# Altium PCB 控制板.PcbDoc
Units mil, origin at the board's own origin, x right, y up, seen from the top; angles counter-clockwise.
Board outline 6220.47 x 2125.98 mil, 2 copper layers (Top Layer, Bottom Layer); 65 components, 149 nets, 530 pads, 107 vias.
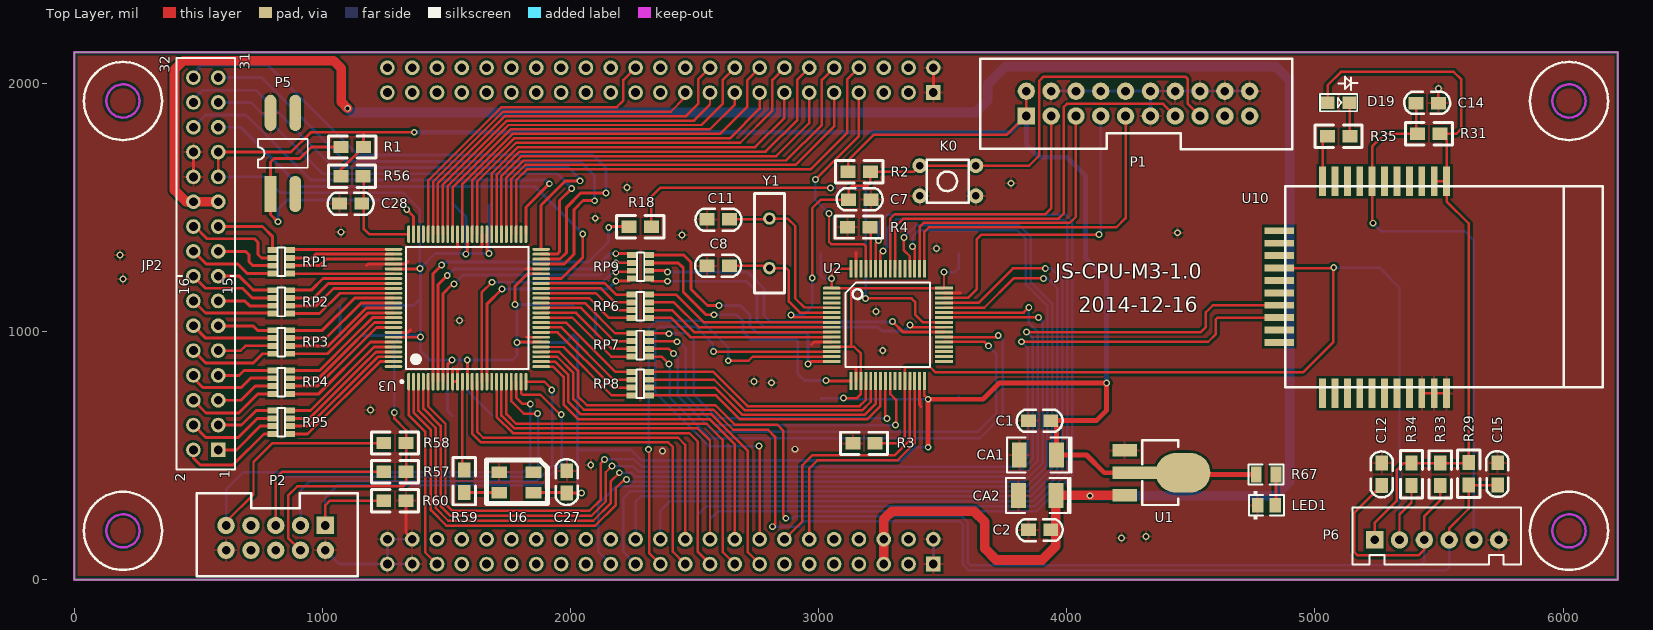
[diagram p0: Top Layer view]
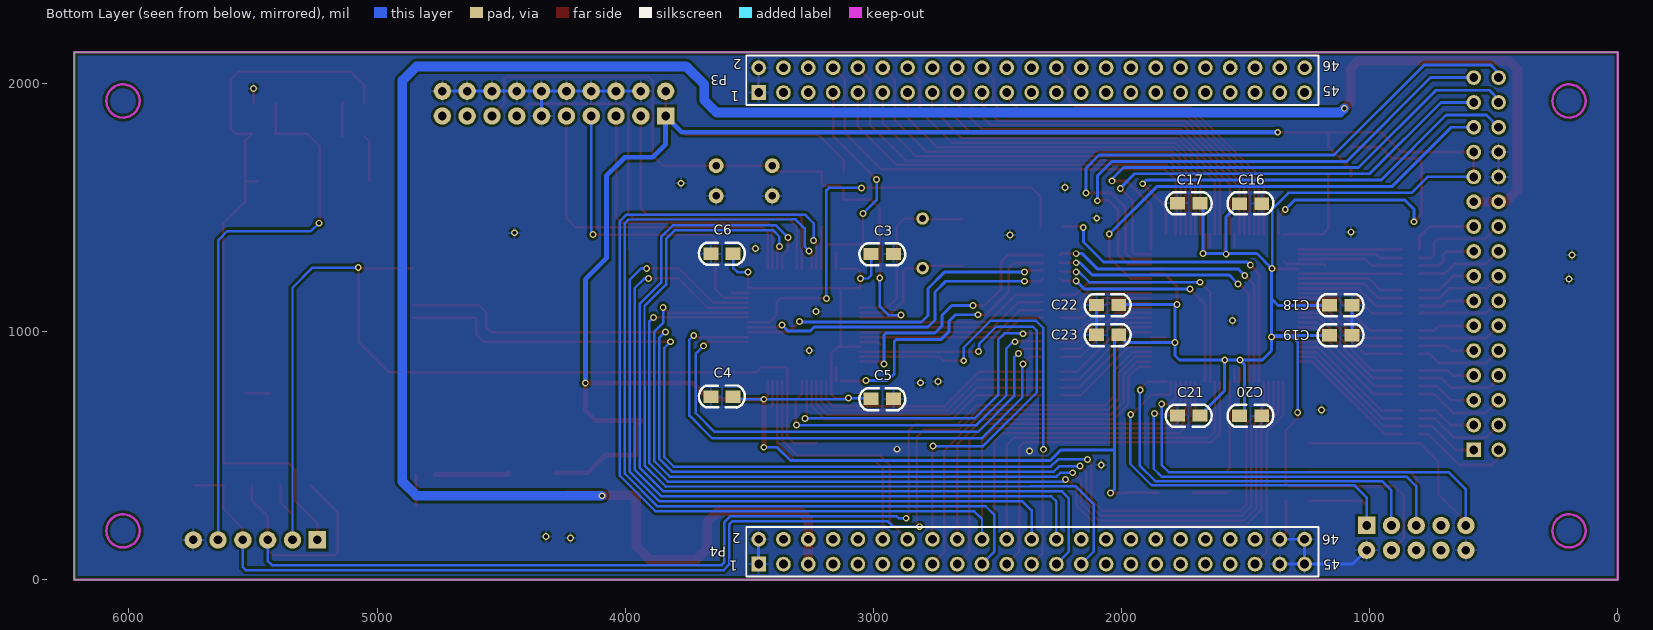
[diagram p1: Bottom Layer view, seen from below]

## Layer stack, top to bottom
Top Solder: solder mask 0.4, Solder Resist, Dk 3.5
Top Layer: signal copper 1.4
Dielectric1: dielectric 12.6, FR-4, Dk 4.8
Bottom Layer: signal copper 1.4
Bottom Solder: solder mask 0.4, Solder Resist, Dk 3.5

## Board outline
0,0 0,2125.98 6220.47,2125.98 6220.47,0

## Design rules (kind name [scope] priority, off if disabled: settings)
Clearance Clearance_1 [InPolygon] p1: gap=10
Clearance [All] p2: gap=7.87
FabricationTestPointUsage TestPointUsage [All] p1: valid=0 allowmultiple=FALSE
FabricationTestpoint Testpoint [(IsPad And (OnTopLayer Or OnBottomLayer))] p1: side=3 testpointundercomponent=TRUE minsize=40 maxsize=100 preferedsize=60 minholesize=0 maxholesize=40 preferedholesize=32 testpointgrid=1 allowsidetop=TRUE allowsidebottom=TRUE usegrid=TRUE gridtolerance=0.01
Height [All] p1: minheight=0 maxheight=3937.01 prefheight=0
HoleSize [All] p1: absolutevalues=TRUE maxlimit=137.8 minlimit=1 maxpercent=80.000 minpercent=20.000
PolygonConnect [All] p1: connectstyle=Relief reliefconductorwidth=10 reliefentries=4 polygonreliefangle="90 Angle" airgapwidth=10
RoutingVias [All] p1: holewidth=13.78 width=25.59 viastyle="Through Hole" minholewidth=13.78 minwidth=25.59 maxholewidth=28 maxwidth=50
SolderMaskExpansion [All] p1: expansion=4
Width [All] p1: maxlimit=78.74 minlimit=10 preferedwidth=11.81 minimp=50.000000 maximp=50.000000 favimp=50.000000
25 further rules are at their usual default settings.

## Components (designator, comment, footprint, x,y, rotation, side; value= is the part's Value field where it differs from the comment)
C1 "0.1uF" C0805 3857.48,645.28 r0 top
C2 "0.1uF" C0805 3857.48,205.51 r0 top
C3 "0.1uF" C0805 2996.85,1316.93 r180 bottom
C4 "0.1uF" C0805 3577.17,733.07 r0 bottom
C5 "0.1uF" C0805 2996.85,733.07 r180 bottom
C6 "0.1uF" C0805 3577.17,1309.06 r0 bottom
C7 "0.1uF" C0805 3198.43,1527.56 r180 top
C8 "22pF" C0805 2627.95,1260.24 r180 top
C11 "22pF" C0805 2562.99,1456.3 r0 top
C12 "101" C0805 5273.62,457.48 r270 top
C14 "0.1uF" C0805 5485.04,1916.14 r180 top
C15 "101" C0805 5740.55,459.06 r270 top
C16 "0.1uF" C0805 1447.24,1511.19 r0 bottom
C17 "0.1uF" C0805 1762.2,1521.65 r180 bottom
C18 "0.1uF" C0805 1084.27,1100.95 r0 bottom
C19 "0.1uF" C0805 1084.27,980.26 r0 bottom
C20 "0.1uF" C0805 1447.24,655.68 r0 bottom
C21 "0.1uF" C0805 1762.2,666.14 r180 bottom
C22 "0.1uF" C0805 2088.96,1111.42 r180 bottom
C23 "0.1uF" C0805 2088.96,990.72 r180 bottom
C27 "0.1uF" C0805 1990.16,426.77 r270 top
C28 "0.1uF" C0805 1081.1,1520.47 r0 top
CA1 "4.7UF/16V" 3528cap 3957.48,503.54 r180 top
CA2 "10UF/16V" 3528cap 3954.72,340.16 r180 top
D19 "VDD33" 0805LED 5096.46,1922.05 r0 top
JP2 "Header2*16" PIN-S-2.54-2*16 579.53,523.23 r90 top
K0 "KEY" KEY-DIP 3518.5,1605.91 r180 top
LED1 "0805/Green" LED-0805 4863.78,335.04 r180 top
P1 "Header 10X2" IDC-20 3835.83,1868.5 r0 top
P2 "Header 5X2" IDC-10 1013.39,218.9 r180 top
P3 "Header 23X2" HDR2X23 3462.2,1962.99 r180 bottom locked
P4 "Header 23X2" HDR2X23 3462.2,63.15 r180 bottom locked
P5 "Header 2X2" SOP4 791.34,1554.33 r90 top
P6 "ISP" SIP-6B 5240.55,160.63 r0 top
R1 "10K" R0805 1129.53,1737.8 r0 top
R2 "10k" R0805 3172.44,1637.8 r0 top
R3 "10K" R0805 3191.73,543.31 r0 top
R4 "10K" R0805 3170.47,1414.96 r0 top
R18 "22Ω" R0805 2290.16,1416.93 r0 top
R29 "3.3k" R0805 5613.39,418.11 r270 top
R31 "Res2" 0805 5413.78,1797.24 r0 top
R33 "3.3k" R0805 5499.21,415.75 r270 top
R34 "10K" R0805 5394.88,433.86 r90 top
R35 "620Ω" R0805 5104.33,1780.71 r0 top
R56 "10K" R0805 1110.63,1632.28 r180 top
R57 "10K" R0805 1301.57,428.84 r0 top
R58 "10K" R0805 1301.57,544.88 r0 top
R59 "33Ω" R0805 1566.54,388.1 r270 top
R60 "10K" R0805 1283.57,324.8 r180 top
R67 "1K/1%/0805/1/8W" R-0805 4862.2,459.45 r180 top
RP1 "RESPACK4" 8P4R_0603 800.08,1328.35 r0 top
RP2 "RESPACK4" 8P4R_0603 800.08,1166.73 r0 top
RP3 "RESPACK4" 8P4R_0603 800.08,1005.12 r0 top
RP4 "RESPACK4" 8P4R_0603 800.08,843.5 r0 top
RP5 "RESPACK4" 8P4R_0603 800.08,681.89 r0 top
RP6 "RESPACK4" 8P4R_0603 2246.46,1149.21 r0 top
RP7 "RESPACK4" 8P4R_0603 2246.46,993.31 r0 top
RP8 "RESPACK4" 8P4R_0603 2246.46,837.4 r0 top
RP9 "RESPACK4" 8P4R_0603 2247.24,1308.27 r0 top
U1 "AS1117-3.3V" SOT-223 4467.32,431.1 r270 top
U2 "STM32" LQFP64 3052.36,1174.8 r0 top locked
U3 "EPM240T100C5N" TQFP100_N 1584.25,1095.28 r90 top locked
U6 "oscillator" JZ-5032 1781.89,392.13 r180 top
U10 "STM32W108-3" STM32W108-3 4880.32,775.98 r0 top
Y1 "8MHZ" XTAL 2801.57,1255.51 r90 top

## Footprints (in the part's own frame and the unit in brackets; to place one, negate y for a bottom-side part, rotate by r counter-clockwise, add the part's x,y. Pads: shape width x height; smd on the part's side, far side on the other; paste and mask are expansions set on the pad)
8P4R_0603 [mm]
  rect 1.016x0.6 smd: 1(0,0) 2(1.778,0) 3(0,-0.8) 4(1.778,-0.8) 5(0,-1.6) 6(1.778,-1.6) 7(0,-2.4) 8(1.778,-2.4)
  silkscreen extent 0.51,-2.67 1.27,0.25
0805 [mil]
  rect 60x50 smd: 1(0,0) 2(90,0)
  silkscreen extent -50,-45 140,45
0805LED [mm]
  rect 1.4x1.27 smd: 1(-1.143,0.013) 2(1.067,0.013)
  silkscreen extent -1.94,-0.88 1.88,2.67
3528cap [mil]
  rect 60x100 smd: 1(-1,1) 2(149,1)
  silkscreen extent -61,-69 199,71
C0805 [mm]
  rect 1.524x1.27 smd: 1(-0.31,-0.11) 2(1.976,-0.11)
  silkscreen extent -1.51,-1.26 3.19,0.99
HDR2X23 [mm] "Connector; Header; 23x2 Position"
  rect 1.5x1.5 hole 0.9: 1(0,0)
  round 1.5 hole 0.9: 2(0,2.54) 3(2.54,0) 4(2.54,2.54) 5(5.08,0) 6(5.08,2.54) 7(7.62,0) 8(7.62,2.54) 9(10.16,0) 10(10.16,2.54) 11(12.7,0) 12(12.7,2.54) 13(15.24,0) 14(15.24,2.54) 15(17.78,0) 16(17.78,2.54) 17(20.32,0) 18(20.32,2.54) 19(22.86,0) 20(22.86,2.54) 21(25.4,0) 22(25.4,2.54) 23(27.94,0) 24(27.94,2.54) 25(30.48,0) 26(30.48,2.54) 27(33.02,0) 28(33.02,2.54) 29(35.56,0) 30(35.56,2.54) 31(38.1,0) 32(38.1,2.54) 33(40.64,0) 34(40.64,2.54) 35(43.18,0) 36(43.18,2.54) 37(45.72,0) 38(45.72,2.54) 39(48.26,0) 40(48.26,2.54) 41(50.8,0) 42(50.8,2.54) 43(53.34,0) 44(53.34,2.54) 45(55.88,0) 46(55.88,2.54)
  silkscreen extent -1.27,-1.27 57.28,3.81
IDC-10 [mil]
  rect 70x70 hole 35: 1(1,0)
  round 70 hole 35: 2(1,100) 3(101,0) 4(101,100) 5(201,0) 6(201,100) 7(301,0) 8(301,100) 9(401,0) 10(401,100)
  silkscreen extent -130,-130 520,205
IDC-20 [mil]
  rect 70x70 hole 35: 1(1,0)
  round 70 hole 35: 2(1,100) 3(101,0) 4(101,100) 5(201,0) 6(201,100) 7(301,0) 8(301,100) 9(401,0) 10(401,100) 11(501,0) 12(501,100) 13(601,0) 14(601,100) 15(701,0) 16(701,100) 17(801,0) 18(801,100) 19(901,0) 20(901,100)
  silkscreen extent -185,-133 1073,231
JZ-5032 [mm]
  rect 1.6x1.2 smd: 1(-1.75,-1.05) 2(1.75,-1.05) 3(1.75,1.05) 4(-1.75,1.05)
  silkscreen extent -3.18,-2.29 3.05,2.16
KEY-DIP [mil]
  round 60 hole 30: 1(-115,59.45) 2(-115,-62.6) 3(111,-62.6) 4(111,59.45)
  silkscreen extent -87,-86 83,87
LED-0805 [mm]
  rect 1.2x1.5 smd: 1(0.6,0.9) 2(2.4,0.9)
  silkscreen extent -0.3,-0.55 3.3,2.35
LQFP64 [mm]
  oval 1.8x0.3 smd: 1(0,0)
  rect 1.8x0.3 smd: 2(0,-0.5) 3(0,-1) 4(0,-1.5) 5(0,-2) 6(0,-2.5) 7(0,-3) 8(0,-3.5) 9(0,-4) 10(0,-4.5) 11(0,-5) 12(0,-5.5) 13(0,-6) 14(0,-6.5) 15(0,-7) 16(0,-7.5) 33(11.5,-7.5) 34(11.5,-7) 35(11.5,-6.5) 36(11.5,-6) 37(11.5,-5.5) 38(11.5,-5) 39(11.5,-4.5) 40(11.5,-4) 41(11.5,-3.5) 42(11.5,-3) 43(11.5,-2.5) 44(11.5,-2) 45(11.5,-1.5) 46(11.5,-1) 47(11.5,-0.5) 48(11.5,0)
  rect 0.3x1.8 smd: 17(2,-9.5) 18(2.5,-9.5) 19(3,-9.5) 20(3.5,-9.5) 21(4,-9.5) 22(4.5,-9.5) 23(5,-9.5) 24(5.5,-9.5) 25(6,-9.5) 26(6.5,-9.5) 27(7,-9.5) 28(7.5,-9.5) 29(8,-9.5) 30(8.5,-9.5) 31(9,-9.5) 32(9.5,-9.5) 49(9.5,2) 50(9,2) 51(8.5,2) 52(8,2) 53(7.5,2) 54(7,2) 55(6.5,2) 56(6,2) 57(5.5,2) 58(5,2) 59(4.5,2) 60(4,2) 61(3.5,2) 62(3,2) 63(2.5,2) 64(2,2)
  silkscreen extent 1.43,-8.07 10.07,0.56
PIN-S-2.54-2*16 [mm]
  rect 1.5x1.5 hole 0.9: 1(0,-0.025)
  round 1.5 hole 0.9: 2(0,2.515) 3(2.54,-0.025) 4(2.54,2.515) 5(5.08,-0.025) 6(5.08,2.515) 7(7.62,-0.025) 8(7.62,2.515) 9(10.16,-0.025) 10(10.16,2.515) 11(12.7,-0.025) 12(12.7,2.515) 13(15.24,-0.025) 14(15.24,2.515) 15(17.78,-0.025) 16(17.78,2.515) 17(20.32,-0.025) 18(20.32,2.515) 19(22.86,-0.025) 20(22.86,2.515) 21(25.4,-0.025) 22(25.4,2.515) 23(27.94,-0.025) 24(27.94,2.515) 25(30.48,-0.025) 26(30.48,2.515) 27(33.02,-0.025) 28(33.02,2.515) 29(35.56,-0.025) 30(35.56,2.515) 31(38.1,-0.025) 32(38.1,2.515)
  silkscreen extent -2,-1.76 40.1,4.24
R0805 [mil]
  rect 60x50 smd: 1(-54,6) 2(36,6)
  silkscreen extent -104,-39 86,51
R-0805 [mm]
  rect 1.1x1.6 smd: 1(0.5,0.9) 2(2.5,0.9)
  silkscreen extent -0.3,-0.1 3.3,1.9
SIP-6B [mil]
  rect 70x70 hole 35: 1(0,0)
  round 70 hole 35: 2(100,0) 3(200,0) 4(300,0) 5(400,0) 6(500,0)
  silkscreen extent -90,-100 590,130
SOP4 [mm]
  rect 3.7x1.2 smd: 1(0,0)
  oval 3.7x1.2 smd: 2(8.3,0) 3(0,-2.54) 4(8.3,-2.54)
  silkscreen extent 2.68,-3.81 5.62,1.27
SOT-223 [mil]
  rect 50x100 smd: 1(-90.5,-234) 3(90.5,-234)
  oval 160x220 smd: 2(0,1)
  rect 50x200 smd: 2(0,-184)
  silkscreen extent -130,-164 130,-19
STM32W108-3 [mm]
  rect 0.7x3 smd: 1(16.51,21.074) 2(15.24,21.074) 3(13.97,21.074) 4(12.7,21.074) 5(11.43,21.074) 6(10.16,21.074) 7(8.89,21.074) 8(7.62,21.074) 9(6.35,21.074) 10(5.08,21.074) 11(3.81,21.074) 22(3.81,-0.627) 23(5.08,-0.627) 24(6.35,-0.627) 25(7.62,-0.627) 26(8.89,-0.627) 27(10.16,-0.627) 28(11.43,-0.627) 29(12.7,-0.627) 30(13.97,-0.627) 31(15.24,-0.627) 32(16.51,-0.627)
  rect 3x0.7 smd: 12(-0.627,16.002) 13(-0.627,14.732) 14(-0.627,13.462) 15(-0.627,12.192) 16(-0.627,10.922) 17(-0.627,9.652) 18(-0.627,8.382) 19(-0.627,7.112) 20(-0.627,5.842) 21(-0.627,4.572)
  silkscreen extent 0,0 32.51,20.57
TQFP100_N [mm] "100-Pin Plastic Thin Quad Flat Pack (TQFP100), IPC Medium Density"
  oval 1.8x0.3 smd: 1(-7.55,6) 2(-7.55,5.5) 3(-7.55,5) 4(-7.55,4.5) 5(-7.55,4) 6(-7.55,3.5) 7(-7.55,3) 8(-7.55,2.5) 9(-7.55,2) 10(-7.55,1.5) 11(-7.55,1) 12(-7.55,0.5) 13(-7.55,0) 14(-7.55,-0.5) 15(-7.55,-1) 16(-7.55,-1.5) 17(-7.55,-2) 18(-7.55,-2.5) 19(-7.55,-3) 20(-7.55,-3.5) 21(-7.55,-4) 22(-7.55,-4.5) 23(-7.55,-5) 24(-7.55,-5.5) 25(-7.55,-6) 51(7.55,-6) 52(7.55,-5.5) 53(7.55,-5) 54(7.55,-4.5) 55(7.55,-4) 56(7.55,-3.5) 57(7.55,-3) 58(7.55,-2.5) 59(7.55,-2) 60(7.55,-1.5) 61(7.55,-1) 62(7.55,-0.5) 63(7.55,0) 64(7.55,0.5) 65(7.55,1) 66(7.55,1.5) 67(7.55,2) 68(7.55,2.5) 69(7.55,3) 70(7.55,3.5) 71(7.55,4) 72(7.55,4.5) 73(7.55,5) 74(7.55,5.5) 75(7.55,6)
  oval 0.3x1.8 smd: 26(-6,-7.55) 27(-5.5,-7.55) 28(-5,-7.55) 29(-4.5,-7.55) 30(-4,-7.55) 31(-3.5,-7.55) 32(-3,-7.55) 33(-2.5,-7.55) 34(-2,-7.55) 35(-1.5,-7.55) 36(-1,-7.55) 37(-0.5,-7.55) 38(0,-7.55) 39(0.5,-7.55) 40(1,-7.55) 41(1.5,-7.55) 42(2,-7.55) 43(2.5,-7.55) 44(3,-7.55) 45(3.5,-7.55) 46(4,-7.55) 47(4.5,-7.55) 48(5,-7.55) 49(5.5,-7.55) 50(6,-7.55) 76(6,7.55) 77(5.5,7.55) 78(5,7.55) 79(4.5,7.55) 80(4,7.55) 81(3.5,7.55) 82(3,7.55) 83(2.5,7.55) 84(2,7.55) 85(1.5,7.55) 86(1,7.55) 87(0.5,7.55) 88(0,7.55) 89(-0.5,7.55) 90(-1,7.55) 91(-1.5,7.55) 92(-2,7.55) 93(-2.5,7.55) 94(-3,7.55) 95(-3.5,7.55) 96(-4,7.55) 97(-4.5,7.55) 98(-5,7.55) 99(-5.5,7.55) 100(-6,7.55)
  silkscreen extent -7.67,-6.25 6.25,6.82, body extent -7,-7 7,7, height 1.2
XTAL [mil]
  round 50 hole 28: 1(0,0) 2(200,0)
  silkscreen extent -100,-60 300,60

## Part data
C1 C2 C3 C4 C5 C6 C7 C8 C11 C12 C14 C15 C16 C17 C18 C19 C20 C21 C22 C23 C27 C28: library part Cap, "Capacitor"
CA1 CA2: library part ECAP
D19: library part LED3, "Typical BLUE SiC LED"
LED1: library part ASD-0012AA
P1: "Header, 10-Pin, Dual row"
P2: "Header, 5-Pin, Dual row"
P3 P4: "Header, 23-Pin, Dual row"
P5: "Header, 2-Pin, Dual row"
P6: library part "Header 6", "Header, 6-Pin"
R1 R3 R4 R34 R56 R57 R58 R59 R60: library part Res2, "Resistor"
R2 R29 R33: library part Res3, "Resistor"
R18: library part "Res Semi", "Semiconductor Resistor"
R31: "Resistor"
R35: library part RES, "R"
R67: library part ASR-0028BA
U1: library part AS1117
U2: library part STM32F103RE
U3: library part EPM240GT100C5N, "MAX II 1.8V CPLD, 80 IOs, 240 Logic Elements, 100-Pin Plastic TQFP, Commercial Temperature, Speed Grade 5, Pb-Free"
Y1: library part XTAL, "Crystal Oscillator"

## Via types
v1: diameter 27.56, hole 15.75, Top Layer to Bottom Layer, 107 vias

## Nets (pads, with @x,y where several pads share a name; then routed paths per layer and width w, separated by ;. In a path a pad name is that pad's centre, name@x,y a point inside that pad or via, vN(x,y) a via of type N, cw(c..) or ccw(c..) an arc to the next point about the centre after c; other vN are vias at no path point)
/RESET1: C14.2 P6.5 R31.1 U10.7 | length 2283.4
  Top Layer w10: v1(5234.25,1436.61) 5230.32,1440.55 U10.7 5230.32,1745.67 5281.89,1797.24 R31.1 5407.24,1803.78 C14.2
  Bottom Layer w10: v1(5234.25,1436.61) 5266.14,1404.72 5603.54,1404.72 5640.55,1367.72 P6.5
AD_R\D\Y\: P3.7 U2.61 | length 942.3
  Top Layer w10: v1(2987.01,1612.2) 3162.2,1787.4 P3.7 ; v1(3041.73,1475.2) 3041.73,1361.42 3050.79,1352.36 3180.71,1352.36 3190.16,1342.91 U2.61
  Bottom Layer w10: v1(2987.01,1612.2) 2987.01,1529.92 v1(3041.73,1475.2)
BOOT0: R4.2 U2.60 | length 168.8
  Top Layer w10: R4.2 3209.84,1417.59 U2.60
BOOT1: P6.2 R3.2 R34.1 U2.28 U10.15 | length 4262.2
  Top Layer w10: R3.2 3317.02,549.31 3347.64,579.92 U2.28 3347.64,851.18 3353.15,856.69 3449.61,856.69 3471.14,835.16 4950.91,835.16 5074.09,958.35 5074.09,1255.98 U10.15 ; P6.2 5340.55,262.2 5388.88,310.54 R34.1
  Bottom Layer w10: v1(5075.59,1257.48) 5259.45,1257.48 5340.55,1176.38 P6.2
CANRX: P4.26 U2.44 | length 3158
  Top Layer w10: U2.44 3667.32,1096.06 3785.83,1214.57 3786.22,1214.17 v1(3906.3,1214.17)
  Bottom Layer w10: P4.26 2262.2,314.96 2283.14,335.9 2353.45,335.9 3853.24,335.7 3961.99,444.42 3962.06,1030.31 3962.06,1174.55 3922.44,1214.17 v1(3906.3,1214.17)
CANTX: P4.24 U2.45 | length 3126.2
  Top Layer w10: U2.45 3644.1,1115.75 3782.68,1254.33 v1(3913.39,1254.33)
  Bottom Layer w10: P4.24 2362.2,279.13 2399.03,315.96 2524.02,315.96 3861.49,315.79 3981.9,436.17 3981.98,1030.31 3981.98,1208.18 3935.83,1254.33 v1(3913.39,1254.33)
CLK0: R59.1 U3.12 | length 360
  Top Layer w10: U3.12 1563.66,797.13 1563.66,450.98 R59.1
CPLD_R: RP9.7 U3.17 | length 939.3
  Top Layer w11.81: U3.17 1662.99,1110.24 v1(1724.02,1171.26) ; v1(2182.68,1203.94) 2237.4,1203.94 RP9.7
  Bottom Layer w11.81: v1(1724.02,1171.26) 2150,1171.26 v1(2182.68,1203.94)
CPLD_R_IN: RP9.8 U2.40 | length 1349.7
  Top Layer w11.81: RP9.8 2328.27,1202.76 v1(2390.55,1202.76) ; v1@3370.08,1017.32 U2.40
  Bottom Layer w11.81: v1(2390.55,1202.76) 2708.66,1202.76 2751.97,1159.45 2751.97,1046.46 2779.53,1018.9 3238.19,1018.9 3255.51,1001.57 3343.31,1001.57 v1(3367.72,1025.98)
CPLD_W: RP9.5 U3.16 | length 1000.4
  Top Layer w10: U3.16 1643.31,1158.66 v1(1683.46,1198.82) ; v1(2182.68,1240.55) 2242.52,1240.55 RP9.5
  Bottom Layer w10: v1(1683.46,1198.82) 2129.13,1198.82 2170.87,1240.55 v1(2182.68,1240.55)
CPLD_W_IN: RP9.6 U2.39 | length 1355.5
  Top Layer w11.81: RP9.6 2384.65,1245.28 v1(2390.55,1239.37) ; v1(3297.64,1040.94) 3340.94,997.64 3377.17,997.64 U2.39
  Bottom Layer w11.81: v1(2390.55,1239.37) 2714.17,1239.37 2780.32,1173.23 2780.32,1064.96 2806.3,1038.98 3295.67,1038.98 v1(3297.64,1040.94)
DB0: RP6.1 U3.43 | length 383.4
  Top Layer w10: U3.43 2138.98,1193.7 2183.46,1149.21 RP6.1
DB1: RP6.3 U3.42 | length 388.3
  Top Layer w10: U3.42 2122.44,1174.02 2178.74,1117.72 RP6.3
DB2: RP6.5 U3.41 | length 393.2
  Top Layer w10: U3.41 2102.36,1154.33 2170.47,1086.22 RP6.5
DB3: RP6.7 U3.40 | length 398.1
  Top Layer w10: U3.40 2075.59,1134.65 2155.51,1054.72 RP6.7
DB4: RP7.1 U3.39 | length 415.4
  Top Layer w10: U3.39 2058.51,1114.96 2180.16,993.31 RP7.1
DB5: RP7.3 U3.38 | length 420.2
  Top Layer w10: U3.38 2042.91,1095.28 2176.38,961.81 RP7.3
DB6: RP7.5 U3.37 | length 425.1
  Top Layer w10: U3.37 2022.44,1075.59 2167.72,930.32 RP7.5
DB7: RP7.7 U3.36 | length 430
  Top Layer w10: U3.36 2007.09,1055.91 2164.17,898.82 RP7.7
ENABLE1: P4.16 U2.14 | length 1908.2
  Top Layer w10: v1(2576.38,919.68) 2577.16,918.9 U2.14 ; v1(2760.24,538.58) 2762.2,536.61 P4.16
  Bottom Layer w10: v1@2574.02,919.29 2574.02,950.39 2504.72,1019.68 2357.87,1019.68 2341.73,1003.54 2341.73,754.72 2557.87,538.58 v1(2760.24,538.58)
ENABLE2: P4.23 U2.15 | length 1823.1
  Top Layer w10: v1@2316.93,524.41 2316.93,108.43 P4.23 ; v1(2635.83,882.28) 2717.72,882.28 2734.65,899.21 U2.15
  Bottom Layer w10: v1@2315.75,525.59 2315.75,1015.35 2344.09,1043.7 2527.56,1043.7 2635.83,935.43 v1(2635.83,882.28)
  other v1: 2314.17,525.59
GND: C1.1 C2.1 C3.2 C4.2 C5.2 C6.2 C7.1 C8.2 C11.1 C12.1 C14.1 C15.1 C16.1 C17.1 C18.1 C19.1 C20.1 C21.1 C22.1 C23.1 C27.1 C28.1 CA1.2 CA2.2 JP2.24 JP2.26 K0.1 K0.4 LED1.2 P1.4 P1.6 P1.8 P1.10 P1.11 P1.12 P1.14 P1.16 P1.18 P1.20 P2.2 P2.10 P3.1 P3.2 P4.1 P4.2 P4.43 P4.44 P4.45 P4.46 P5.2 P6.6 R3.1 R4.1 R60.1 U1.1 U2.12 U2.18 U2.31 U2.47 U2.63 U3.10 U3.11 U3.32 U3.46 U3.60 U3.65 U3.79 U3.93 U6.2 U10.30 U10.31 U10.32 | length 3314.7
  Top Layer w10: U10.30 U10.31 U10.32 ; C14.1 v1(5497.24,1979.53)
  Top Layer w11.81: JP2.24 JP2.26 ; 1178.35,1266.14 1184.65,1272.44 U3.79 1335.43,1272.44 1345.28,1282.28 ; U3.93 1344.88,996.85 1355.12,1007.09 ; R60.1 1337.57,187.78 P4.44 ; 1525.2,850.79 U3.10 U3.11 1544.88,848.82 ; 1544.88,1338.19 U3.65 ; 1643.31,1338.19 U3.60 ; 1821.26,1252.76 U3.46 ; 1822.44,977.17 U3.32 ; 2971.65,948.43 2981.5,958.27 U2.12 ; U2.18 3150.79,856.69 ; U2.63 3150.79,1318.5 ; U2.31 3406.69,703.54 3412.99,697.24 ; P3.1 P3.2 ; U2.47 3571.65,1155.12
  Bottom Layer w11.81: P2.2 1068.13,63.15 P4.45 ; C19.1 C18.1 ; P4.43 P4.45 ; P4.44 P4.46 P4.45 ; C23.1 C22.1 ; P4.1 P4.2 ; P1.4 P1.6 P1.8 P1.10 P1.12 ; P1.11 P1.12 ; P1.20 P1.18 P1.16 P1.14 P1.12
  other v1: 4220.87,168.5 4318.9,174.02 2081.89,462.6 2370.47,518.11 2904.72,525.98 1193.7,684.25 2810.63,793.7 2739.37,798.82 3258.27,923.23 1552.36,1044.49 3230.71,1081.1 196.46,1211.81 185.04,1307.87 3475.2,1335.04 2449.21,1389.76 4446.46,1398.03 1074.8,1400.39 2100,1456.69 2227.56,1580.71 3774.8,1597.64
GPIO_20: P4.41 U3.1 | length 782.2
  Top Layer w10: U3.1 1348.03,663.39 1414.57,596.85 1414.57,110.79 P4.41
I2C1_SCL: P4.19 U2.58 U3.19 | length 5211.4
  Top Layer w10: U3.19 1702.36,656.14 1767.75,590.75 2478.54,590.75 2513.39,555.91 2513.39,111.97 P4.19 ; U2.58 3249.21,1315.35 v1(3258.66,1324.8)
  Bottom Layer w10: P4.19 2513.39,111.97 2513.39,262.2 2547.21,296.03 2674.02,296.03 3869.74,295.87 4001.81,427.91 4001.94,1435.84 3986.3,1451.49 3331.89,1451.57 3313.39,1451.57 3277.17,1415.35 3277.17,1343.31 v1(3258.66,1324.8)
I2C1_SDA: P4.20 U2.59 U3.20 | length 5047.8
  Top Layer w10: U3.20 1722.05,661.73 1774.23,609.55 2512.89,609.55 2562.2,560.24 P4.20 ; U2.59 3229.53,1355.12 v1(3240.94,1366.54)
  Bottom Layer w10: P4.20 2562.2,244.09 2594.2,276.09 2694.88,276.09 3877.99,275.94 4021.75,419.65 4021.88,1444.1 3994.56,1471.42 3331.89,1471.51 3275.84,1471.51 3240.94,1436.61 v1(3240.94,1366.54)
IO72: U3.72
IO73: U3.73
IO100: U3.100
JNTRST: P1.3 U2.56 | length 1239.1
  Top Layer w10: U2.56 3288.58,1455.12 3306.69,1473.23 3913.78,1473.23 3936.83,1496.28 P1.3
JTCK: P1.9 U2.49 | length 1393.2
  Top Layer w10: U2.49 3426.38,1402.28 3443.7,1419.61 4199.21,1419.61 4236.83,1457.22 P1.9
JTDI: P1.5 U2.50 | length 1220.9
  Top Layer w10: U2.50 3406.69,1421.34 3422.83,1437.48 4011.73,1437.48 4036.83,1462.57 P1.5
JTDO: P1.13 U2.55 | length 1773.6
  Top Layer w10: U2.55 3308.27,1421.65 3341.97,1455.35 3967.17,1455.35 3988.58,1476.77 3988.58,1905.91 4000,1917.32 4388.01,1917.32 P1.13
JTMS: P1.7 U2.46 | length 1328.9
  Top Layer w10: U2.46 3601.18,1135.43 3637.8,1172.05 3637.8,1372.44 3655.91,1390.55 v1(4130.32,1390.55)
  Bottom Layer w10: v1(4130.32,1390.55) 4136.83,1397.06 P1.7
KEY1: JP2.27 U3.44 | length 1943.5
  Top Layer w11.81: U3.44 1964.17,1213.39 2049.61,1298.82 v1(2049.61,1393.31)
  Bottom Layer w11.81: JP2.27 671.65,1823.23 911.02,1583.86 1858.04,1583.86 v1@2048.11,1393.78
KEY2: JP2.28 U3.51 | length 1811.7
  Top Layer w11.81: U3.51 1820.47,1501.18 v1(1914.76,1595.47)
  Bottom Layer w11.81: JP2.28 529.74,1872.44 692.04,1872.44 954.64,1609.84 1901.65,1609.84 v1@1915.39,1596.1
KEY3: JP2.29 U3.49 | length 1921.5
  Top Layer w11.81: U3.49 1946.46,1311.81 1956.3,1321.65 1956.3,1527.56 v1(2004.92,1576.18)
  Bottom Layer w11.81: JP2.29 713.08,1923.23 1000.48,1635.83 1947.49,1635.83 v1@2005.44,1577.88
KEY4: JP2.30 U3.50 | length 2111.6
  Top Layer w11.81: U3.50 1881.5,1508.66 1980.32,1607.48 v1(2038.98,1607.48)
  Bottom Layer w11.81: JP2.30 480.53,1935.25 517.72,1972.44 732.9,1972.44 1044.71,1660.63 1991.73,1660.63 v1@2039.96,1612.4
KEY5: JP2.31 U3.47 | length 2208.5
  Top Layer w11.81: U3.47 1975.2,1272.44 2014.96,1312.2 2014.96,1492.13 2050.79,1527.95 v1@2097.64,1527.95
  Bottom Layer w11.81: JP2.31 754.5,2023.23 1092.29,1685.43 2039.31,1685.43 2097.64,1627.1 v1(2097.64,1527.17)
KEY6: JP2.32 U3.48 | length 2445.7
  Top Layer w11.81: U3.48 1958.27,1292.13 1984.65,1318.5 1984.65,1501.18 2041.34,1557.87 v1(2142.52,1557.87)
  Bottom Layer w11.81: JP2.32 480.53,2042.34 512.6,2074.41 780.15,2074.41 1143.54,1711.02 2090.55,1711.02 2142.52,1659.06 v1(2142.52,1557.87)
LCD_DATA0: JP2.19 RP1.1 | length 290.4
  Top Layer w11.81: JP2.19 759.06,1423.23 800.08,1382.2 RP1.1
LCD_DATA1: JP2.20 RP1.3 | length 400.5
  Top Layer w11.81: JP2.20 486.61,1423.23 535.83,1374.02 726.38,1374.02 740.94,1359.45 740.94,1310.63 754.72,1296.85 RP1.3
LCD_DATA2: JP2.17 RP1.5 | length 259.9
  Top Layer w11.81: JP2.17 690.94,1323.23 704.72,1309.45 704.72,1281.5 720.87,1265.35 RP1.5
LCD_DATA3: JP2.18 RP1.7 | length 356.6
  Top Layer w11.81: JP2.18 530.92,1272.83 658.66,1272.83 697.64,1233.86 RP1.7
LCD_DATA4: JP2.15 RP2.1 | length 243
  Top Layer w11.81: JP2.15 665.75,1223.23 722.24,1166.73 RP2.1
LCD_DATA5: JP2.16 RP2.3 | length 356
  Top Layer w11.81: JP2.16 529.35,1174.41 678.74,1174.41 717.91,1135.24 RP2.3
LCD_DATA6: JP2.13 RP2.5 | length 227.6
  Top Layer w11.81: JP2.13 687.8,1123.23 707.28,1103.74 RP2.5
LCD_DATA7: JP2.14 RP2.7 | length 340.7
  Top Layer w11.81: JP2.14 529.35,1074.41 797.91,1074.41 RP2.7
LCD_DATA8: JP2.11 RP3.1 | length 227.1
  Top Layer w11.81: JP2.11 720.87,1023.23 738.98,1005.12 RP3.1
LCD_DATA9: JP2.12 RP3.3 | length 340.4
  Top Layer w11.81: JP2.12 530.53,973.23 799.68,973.23 RP3.3
LCD_DATA10: JP2.9 RP3.5 | length 227.4
  Top Layer w10: JP2.9 671.26,923.23 690.16,942.13 RP3.5
LCD_DATA11: JP2.10 RP3.7 | length 355.8
  Top Layer w11.81: JP2.10 530.53,873.23 722.05,873.23 759.45,910.63 RP3.7
LCD_DATA12: JP2.7 RP4.1 | length 227.9
  Top Layer w11.81: JP2.7 664.57,823.23 684.84,843.5 RP4.1
LCD_DATA13: JP2.8 RP4.3 | length 361.7
  Top Layer w11.81: JP2.8 480.53,812.39 518.5,774.41 673.62,774.41 711.22,812.01 RP4.3
LCD_DATA14: JP2.5 RP4.5 | length 243.3
  Top Layer w11.81: JP2.5 672.83,723.23 730.12,780.51 RP4.5
LCD_DATA15: JP2.6 RP4.7 | length 372.6
  Top Layer w11.81: JP2.6 531.71,672.05 663.78,672.05 740.75,749.02 RP4.7
LCD_DE: JP2.3 RP5.1 | length 243.8
  Top Layer w11.81: JP2.3 674.8,623.23 733.46,681.89 RP5.1
LCD_HSYNC: JP2.4 RP5.3 | length 372.2
  Top Layer w11.81: JP2.4 530.53,573.23 661.42,573.23 738.58,650.39 RP5.3
LCD_PLCK: JP2.1 RP5.5 | length 259.2
  Top Layer w11.81: JP2.1 653.94,523.23 749.61,618.9 RP5.5
LCD_VSYNC: JP2.2 RP5.7 | length 416
  Top Layer w11.81: JP2.2 480.53,489.16 506.69,462.99 640.55,462.99 764.96,587.4 RP5.7
NetC8_1: C8.1 U2.6 Y1.1 | length 562.8
  Top Layer w10: C8.1 2792.52,1264.57 Y1.1 2869.29,1255.51 2880.32,1244.49 2880.32,1120.47 2924.41,1076.38 U2.6
NetC11_2: C11.2 U2.5 Y1.2 | length 732.6
  Top Layer w10: C11.2 2798.03,1451.97 Y1.2 2875.2,1455.51 2905.91,1424.8 2905.91,1133.46 2942.4,1096.97 3051.46,1096.97 U2.5
NetD19_2: D19.2 R35.2 | length 136.6
  Top Layer w10: D19.2 5140.33,1920.68 R35.2
NetLED1_1: LED1.1 R67.1 | length 125.4
  Top Layer w11.81: LED1.1 4842.52,301.97 R67.1
NetR18_2: R18.2 U2.41 | length 1825.1
  Top Layer w10: R18.2 2326.16,1543.48 2362.99,1580.32 v1@3048.03,1580.32 ; v1(3188.58,1133.86) 3374.8,1133.86 3388.98,1119.68 3388.98,1068.5 3420.47,1037.01 U2.41
  Bottom Layer w10: v1@3048.03,1578.74 3179.53,1578.74 3189.37,1568.9 3189.37,1134.65 v1(3188.58,1133.86)
  other v1: 3048.03,1578.35
NetR35_1: R35.1 U10.11 | length 189.3
  Top Layer w10: U10.11 5030.32,1766.69 R35.1
NetR59_2: R59.2 U6.3 | length 141
  Top Layer w11.81: R59.2 1573.85,350.79 U6.3
NetRP1_2: RP1.2 U3.76 | length 418.2
  Top Layer w11.81: RP1.2 873.23,1331.5 U3.76
NetRP1_4: RP1.4 U3.77 | length 440.5
  Top Layer w11.81: RP1.4 958.27,1296.85 973.23,1311.81 U3.77 ; 921.26,1296.85 938.64,1296.85
NetRP1_6: RP1.6 U3.78 | length 452.8
  Top Layer w11.81: RP1.6 989.76,1265.35 1016.54,1292.13 U3.78 ; 910.24,1265.35 934.99,1265.35
NetRP1_8: RP1.8 U3.81 | length 417.3
  Top Layer w11.81: RP1.8 870.87,1233.07 U3.81
NetRP2_2: RP2.2 U3.82 | length 436.3
  Top Layer w11.81: RP2.2 955.71,1166.73 1002.36,1213.39 U3.82
NetRP2_4: RP2.4 U3.83 | length 441.1
  Top Layer w11.81: RP2.4 965.94,1135.24 1024.41,1193.7 U3.83
NetRP2_6: RP2.6 U3.84 | length 446
  Top Layer w11.81: RP2.6 975.39,1103.74 1045.67,1174.02 U3.84
NetRP2_8: RP2.8 U3.85 | length 450.9
  Top Layer w11.81: RP2.8 988.78,1072.24 1070.87,1154.33 U3.85
NetRP3_2: RP3.2 U3.86 | length 490.2
  Top Layer w11.81: RP3.2 1000,1005.12 1129.53,1134.65 U3.86 ; 907.87,1005.12 927.51,1005.12
NetRP3_4: RP3.4 U3.87 | length 493
  Top Layer w11.81: RP3.4 1015.35,973.62 1156.69,1114.96 U3.87 ; 906.3,973.62 923.85,973.62
NetRP3_6: RP3.6 U3.88 | length 495
  Top Layer w11.81: RP3.6 1024.13,942.13 1177.28,1095.28 U3.88 ; 905.51,942.13 920.19,942.13
NetRP3_8: RP3.8 U3.89 | length 497.1
  Top Layer w11.81: RP3.8 1020.47,910.63 1185.43,1075.59 U3.89 ; 904.72,910.63 916.54,910.63
NetRP4_2: RP4.2 U3.90 | length 504.9
  Top Layer w11.81: RP4.2 989.4,843.5 1118.03,972.13 1201.8,1055.91 U3.90
NetRP4_4: RP4.4 U3.91 | length 509.8
  Top Layer w11.81: RP4.4 985.75,812.01 1074.02,900.28 1209.96,1036.22 U3.91
NetRP4_6: RP4.6 U3.92 | length 514.7
  Top Layer w11.81: RP4.6 982.09,780.51 1099.21,897.64 1218.11,1016.54 U3.92
NetRP4_8: RP4.8 U3.95 | length 503.3
  Top Layer w11.81: RP4.8 986.02,749.02 1194.49,957.48 U3.95
NetRP5_2: RP5.2 U3.96 | length 522.9
  Top Layer w11.81: RP5.2 951.92,681.89 1207.82,937.8 U3.96
NetRP5_4: RP5.4 U3.97 | length 538.8
  Top Layer w11.81: RP5.4 948.26,650.39 1166.06,868.19 ; 1158.27,860.4 1215.98,918.11 U3.97
NetRP5_6: RP5.6 U3.98 | length 532.7
  Top Layer w11.81: RP5.6 944.6,618.9 1177.95,852.25 1224.13,898.43 U3.98
NetRP5_8: RP5.8 U3.99 | length 537.6
  Top Layer w11.81: RP5.8 940.95,587.4 1232.28,878.74 U3.99
NetRP6_2: RP6.2 U2.8 | length 782.4
  Top Layer w10: RP6.2 2425.2,1149.21 2537.4,1037.01 U2.8
NetRP6_4: RP6.4 U2.9 | length 777.5
  Top Layer w10: RP6.4 2416.93,1117.72 2517.32,1017.32 U2.9
NetRP6_6: RP6.6 U2.10 | length 772.6
  Top Layer w10: RP6.6 2409.45,1086.22 2498.03,997.64 U2.10
NetRP6_8: RP6.8 U2.11 | length 767.7
  Top Layer w10: RP6.8 2406.3,1054.72 2483.07,977.95 U2.11
NetRP7_2: RP7.2 U2.24 | length 1396
  Top Layer w10: RP7.2 2394.49,993.31 v1(2396.46,991.34) ; U2.24@3267.99,801.69 U2.24 3268.9,656.69 v1(3275.59,650)
  Bottom Layer w10: v1@2387.4,992.91 2471.65,992.91 2497.64,966.93 2497.64,744.88 2592.52,650 v1(3275.59,650)
NetRP7_4: RP7.4 U2.25 | length 1421.7
  Top Layer w10: RP7.4 v1@2420.08,961.81 ; U2.25 3288.58,748.03 3311.81,724.8 3311.81,625.59 v1(3310.24,624.02)
  Bottom Layer w10: v1@2432.28,963.78 2464.57,931.5 2464.57,742.52 2583.86,623.23 v1@3307.09,623.23 ; v1@3307.09,620.87 v1(3310.24,624.02)
  other v1: 2428.74,959.06
NetRP7_6: RP7.6 U2.37 | length 2137
  Top Layer w10: RP7.6@2322.44,924.33 RP7.6 2396.85,930.32 v1(2415.35,911.81) ; U2.37 3668.5,958.27 v1(3684.25,942.52)
  Bottom Layer w10: v1@2415.55,912.01 2432.68,894.88 2432.68,740.16 2576.38,596.46 3639.76,596.46 ; 3639.76,595.67 3714.96,670.87 3714.96,911.81 v1(3684.25,942.52)
NetRP7_8: RP7.8 U2.38 | length 2224.1
  Top Layer w10: RP7.8 2366.54,898.82 v1(2396.46,868.9) ; U2.38 3716.93,977.95 v1(3723.62,984.65)
  Bottom Layer w10: v1@2399.21,866.93 2399.21,735.43 2564.96,569.68 3649.21,569.68 3741.09,661.56 3741.09,967.18 v1(3723.62,984.65)
NetRP8_2: RP8.2 U2.20 | length 1016.6
  Top Layer w10: RP8.2 2575.59,837.4 2712.99,700 3164.96,700 3190.16,725.2 U2.20
NetRP8_4: RP8.4 U2.21 | length 1042.9
  Top Layer w10: RP8.4 2579.25,805.91 2703.03,682.13 3174.92,682.13 3209.84,717.04 U2.21
NetRP8_6: RP8.6 U2.22 | length 1069.1
  Top Layer w10: RP8.6 2582.91,774.41 2693.06,664.25 3184.89,664.25 3229.53,708.89 U2.22
NetRP8_8: RP8.8 U2.23 | length 1095.3
  Top Layer w10: RP8.8 2586.56,742.91 2683.1,646.38 3194.85,646.38 3249.21,700.74 U2.23
NRST: C7.2 K0.2 K0.3 P1.15 R2.2 U2.7 | length 2795.7
  Top Layer w10: v1(2888.98,1066.54) 2898.82,1056.69 U2.7 ; v1(2974.41,1216.14) 2974.41,1497.24 3009.06,1531.89 C7.2 3120.63,1571.81 3137.01,1588.19 3197.64,1588.19 3208.44,1598.99 R2.2 3382.8,1643.8 K0.3 K0.2 3848.82,1668.5 3888.95,1708.64 3888.95,2009.82 3906.3,2027.17 4477.56,2027.17 4487.01,2017.72 4487.01,1918.32 P1.15
  Bottom Layer w10: v1(2888.98,1066.54) 2939.37,1066.54 2975.2,1102.36 2975.2,1215.35 v1(2974.41,1216.14)
OUT_C\S\: R18.1 U3.6 | length 1331.4
  Top Layer w11.81: U3.6 1446.46,1233.07 v1(1481.1,1267.72) ; v1(2154.33,1419.29) 2157.97,1422.93 R18.1
  Bottom Layer w11.81: v1(1481.1,1267.72) 1493.7,1280.32 2072.44,1280.32 2153.54,1361.42 v1@2153.54,1414.17
OUT_C\S\-O: P4.15 U3.27 | length 1521.7
  Top Layer w10: U3.27 1938.47,878.74 1991.73,825.48 1991.73,716.34 2042.12,665.94 2567.78,665.94 2714.57,519.16 2714.57,110.79 P4.15
PA0: P3.14 U3.61 | length 1712.7
  Top Layer w10: U3.61 1623.62,1603.79 1780.62,1760.79 2684.02,1760.79 2813.39,1890.16 2813.39,2014.17 P3.14
PA1: P3.13 U3.58 | length 1619.1
  Top Layer w10: U3.58 1682.68,1637.57 1788.02,1742.91 2744.09,1742.91 2862.2,1861.02 P3.13
PA2: P3.12 U3.57 | length 1772.6
  Top Layer w10: U3.57 1702.36,1631.98 1795.42,1725.04 2786.06,1725.04 2914.17,1853.15 2914.17,2014.96 P3.12
PA3: P3.11 U3.56 | length 1685.4
  Top Layer w10: U3.56 1722.05,1626.39 1802.83,1707.17 2829.21,1707.17 2962.2,1840.16 P3.11
PA4: P3.10 U3.55 | length 1837.8
  Top Layer w10: U3.55 1741.73,1620.79 1810.23,1689.29 2869.21,1689.29 3012.99,1833.07 3012.99,2013.78 P3.10
PA5: P3.9 U3.54 | length 1747.6
  Top Layer w10: U3.54 1761.42,1615.2 1817.64,1671.42 2907.24,1671.42 3062.2,1826.38 P3.9
PA6: P3.8 U3.53 | length 1911.9
  Top Layer w10: U3.53 1781.1,1609.61 1825.04,1653.54 2967.72,1653.54 3114.57,1800.39 3114.57,2015.35 P3.8
PA7: U3.52
PB0: P3.15 U3.62 | length 1559.7
  Top Layer w10: U3.62 1603.94,1609.39 1773.21,1778.66 2642.83,1778.66 2762.2,1898.03 P3.15
PB1: P3.16 U3.64 | length 1656.4
  Top Layer w10: U3.64 1564.57,1595.29 1765.81,1796.54 2602.05,1796.54 2712.6,1907.09 2712.6,2013.39 P3.16
PB2: P3.17 U3.66 | length 1511.7
  Top Layer w10: U3.66 1525.2,1581.2 1758.41,1814.41 2561.26,1814.41 2662.2,1915.35 P3.17
PB3: P3.18 U3.67 | length 1604.9
  Top Layer w10: U3.67 1505.51,1586.79 1751,1832.28 2528.35,1832.28 2613.39,1917.32 2613.39,2014.17 P3.18
PB4: P3.19 U3.68 | length 1458.4
  Top Layer w10: U3.68 1485.83,1592.38 1743.6,1850.16 2498.19,1850.16 2562.2,1914.17 P3.19
PB5: P3.20 U3.69 | length 1551.8
  Top Layer w10: U3.69 1466.14,1597.98 1736.2,1868.03 2465.67,1868.03 2514.57,1916.93 2514.57,2015.35 P3.20
PB6: P3.21 U3.70 | length 1386.7
  Top Layer w10: U3.70 1446.46,1603.57 1728.79,1885.91 2404.02,1885.91 2462.2,1944.09 P3.21
PB7: P3.26 U3.71 | length 1288.8
  Top Layer w10: U3.71 1426.77,1609.16 1721.39,1903.78 2186.22,1903.78 2213.39,1930.94 2213.39,2014.17 P3.26
PWM_TIM1_CH3: U10.16
RST_N: C28.2 R56.1 U3.75 | length 402.5
  Top Layer w10: R56.1@1167.95,1626.77 1167.95,1412.76 1188.19,1392.52 U3.75
SPI1-MISO: RP8.5 U3.33 | length 457.1
  Top Layer w10: U3.33 1948.43,996.85 2170.87,774.41 RP8.5
SPI1-MISO-O: P4.21 U3.14 | length 1532.4
  Top Layer w10: U3.14 1603.94,588.7 1639.49,553.15 2394.09,553.15 2412.6,534.65 2412.6,112.76 P4.21
SPI1-MOSI: RP8.7 U3.30 | length 445.7
  Top Layer w10: U3.30 1971.65,937.8 2166.54,742.91 RP8.7
SPI1-MOSI-O: P4.18 U3.26 | length 1357.9
  Top Layer w10: U3.26 1930.31,859.06 1972.05,817.32 1972.05,705.91 2030.81,647.15 2560,647.15 2662.2,544.94 P4.18
SPI1-NSS: RP8.1 U3.35 | length 447.3
  Top Layer w10: U3.35 1982.28,1036.22 2181.1,837.4 RP8.1
SPI1-NSS-O: P4.17 U3.21 | length 1566.3
  Top Layer w10: U3.21 1741.73,667.32 1780.71,628.35 2549.21,628.35 2613.78,563.78 2613.78,111.57 P4.17
SPI1-SCK: RP8.3 U3.34 | length 452.2
  Top Layer w10: U3.34 1963.39,1016.54 2174.02,805.91 RP8.3
SPI1-SCK-O: P4.22 U3.15 | length 1442.6
  Top Layer w10: U3.15 1623.62,596.85 1648.52,571.95 2434.35,571.95 2462.2,544.09 P4.22
TCK: P2.1 R60.2 U3.24 | length 1890.1
  Top Layer w10: P2.1 1012.39,300.18 1031.01,318.8 R60.2 ; U3.24 1800.79,751.18 1806.69,745.28 1878.74,745.28 1958.66,665.35 v1(1962.99,665.35)
  Bottom Layer w10: P2.1 1012.39,331.28 1060.94,379.84 1878.27,379.84 1965.75,467.32 1965.75,662.6 v1(1962.99,665.35)
TDI: P2.9 R58.1 U3.23 | length 2646.7
  Top Layer w10: P2.9 612.39,233.46 722.83,343.91 722.83,473.62 800.09,550.88 R58.1 ; U3.23 1781.1,733.86 1806.3,708.66 v1(1838.19,708.66)
  Bottom Layer w10: P2.9 612.39,363.17 682.68,433.46 1809.84,433.46 1838.19,461.81 v1(1838.19,708.66)
TDO: P2.3 U3.25 | length 1621.3
  Top Layer w10: U3.25 1894.49,798.03 v1@1924.8,767.72
  Bottom Layer w10: P2.3 912.39,359.24 950.87,397.72 1864.25,397.72 1927.56,461.02 v1@1927.56,767.72
  other v1: 1924.41,764.17
TMS: P2.5 R57.1 U3.22 | length 2308.9
  Top Layer w10: P2.5 812.39,409.24 837.99,434.84 R57.1 ; U3.22 1761.42,720.08 1811.81,669.68 v1(1867.72,669.68)
  Bottom Layer w10: P2.5 812.39,375.77 852.2,415.59 1838.43,415.59 1870.08,447.24 1870.08,667.32 v1(1867.72,669.68)
UART1_RX: U2.43 U3.3 | length 4133.6
  Top Layer w10: U3.3 1387.4,681.72 1457.09,612.04 1457.09,288.42 1507.71,237.8 2091.9,237.8 2161.81,307.71 2161.81,396.19 v1(2196.85,431.23) ; U2.43 3825.99,1076.38 v1(3846.85,1097.24)
  Bottom Layer w10: v1(2196.85,431.23) 2246.33,431.23 2261.92,415.64 2316.14,415.64 3820.23,415.45 3882.25,477.46 3882.32,998.03 3882.32,999.57 3846.85,1035.04 v1(3846.85,1097.24)
UART1_TX: U2.42 U3.2 | length 4164.2
  Top Layer w10: U3.2 1367.72,673.57 1437.4,603.88 1437.4,280.26 1499.55,218.11 2100.05,218.11 2181.5,299.55 2181.5,368.73 2217.09,404.33 v1(2226.38,404.33) ; U2.42 v1(3886.22,1056.69)
  Bottom Layer w10: v1(2226.38,404.33) 2235,395.7 2335.88,395.7 3828.48,395.51 3902.18,469.2 3902.26,1030.32 3902.26,1040.66 v1(3886.22,1056.69)
UART2_RX: RP9.3 U3.8 | length 1167.8
  Top Layer w11.81: U3.8 1485.83,1122.05 1485.83,1152.76 1524.8,1191.73 v1(1530.32,1191.73) ; v1(2182.68,1277.17) 2246.85,1277.17 RP9.3
  Bottom Layer w11.81: v1(1530.32,1191.73) 1566.14,1227.56 2118.11,1227.56 2167.72,1277.17 v1(2182.68,1277.17)
UART2_RX-O_STATUS: P5.1 R1.1 U3.74 | length 1273.3
  Top Layer w11.81: v1(820.87,1442.52) 791.34,1472.05 P5.1 791.34,1683.07 805.12,1696.85 909.06,1696.85 956,1743.8 R1.1 ; v1(1340.16,1491.73) 1367.72,1464.17 U3.74
  Bottom Layer w11.81: v1(820.87,1442.52) 820.87,1491.34 860.24,1530.71 1301.18,1530.71 v1(1340.16,1491.73)
UART2_RX_IN: RP9.4 U2.17 | length 1168.8
  Top Layer w11.81: RP9.4 2434.25,1276.77 2454.33,1256.69 2454.33,1159.84 2546.46,1067.72 v1(2577.95,1067.72) ; v1(3029.92,802.36) 3031.5,800.79 U2.17
  Bottom Layer w11.81: v1(2577.95,1067.72) 2669.29,1067.72 2694.49,1042.52 2694.49,1001.18 2728.35,967.32 2908.66,967.32 2915.75,960.24 2915.75,829.13 2942.52,802.36 v1(3029.92,802.36)
UART2_TX: RP9.1 U3.7 | length 1225.8
  Top Layer w11.81: U3.7 1466.14,1188.58 v1(1503.54,1225.98) ; v1(2182.68,1313.78) 2241.73,1313.78 RP9.1
  Bottom Layer w11.81: v1(1503.54,1225.98) 1530.31,1252.76 2097.64,1252.76 2158.66,1313.78 v1(2182.68,1313.78)
UART2_TX_IN: RP9.2 U2.16 | length 1077.6
  Top Layer w11.81: RP9.2 2456.69,1308.27 2485.83,1279.13 2485.83,1170.87 2551.97,1104.72 v1@2598.43,1104.72 ; v1(2957.48,868.9) 2968.11,879.53 U2.16
  Bottom Layer w11.81: v1@2598.43,1104.72 2683.86,1104.72 2723.23,1065.35 2723.23,1023.23 2751.97,994.49 2948.03,994.49 2957.48,985.04 v1(2957.48,868.9)
  other v1: 2598.43,1105.51
UART3_RX: P4.12 U2.30 | length 1002.9
  Top Layer w10: P4.12 2962.2,448.43 2995.28,481.5 3318.5,481.5 3387.01,550 U2.30
UART3_TX: P4.14 U2.29 | length 1041
  Top Layer w10: P4.14 2933.86,234.8 2933.86,461.02 2974.02,501.18 3305.51,501.18 3367.32,562.99 U2.29
UART4_RX: P4.25 U2.52 | length 3717.8
  Top Layer w10: v1(3343.7,1378.74) 3343.7,1327.17 3367.32,1303.54 U2.52
  Bottom Layer w10: P4.25 2212.99,112.36 2212.99,329.13 2239.69,355.83 2348.88,355.83 3844.99,355.64 3942.05,452.68 3942.14,1110.45 3854.97,1197.64 3854.99,1381.07 3807.52,1428.54 3405.12,1428.6 3393.56,1428.6 v1(3343.7,1378.74)
UART4_TX: P4.27 U2.51 | length 3699
  Top Layer w10: v1(3378.35,1343.31) 3387.01,1334.65 U2.51
  Bottom Layer w10: P4.27 2112.6,112.76 2112.6,304.72 2183.64,375.77 2365.75,375.77 3836.73,375.58 3922.12,460.94 3922.2,1102.19 3835.03,1189.38 3835.05,1372.81 3799.26,1408.61 3405.12,1408.66 3378.35,1381.89 v1(3378.35,1343.31)
UART_RX-O: C12.2 P6.3 R33.2 U3.29 | length 5266.7
  Top Layer w10: U3.29 1954.78,918.11 2031.1,841.78 2031.1,737.99 2065.55,703.54 2583.36,703.54 2662.1,624.8 2833.07,624.8 2857.09,600.79 2857.09,258.27 v1(2867.72,247.64) ; C12.2 5268.66,379.68 5157.48,268.5 5157.48,112.6 5171.65,98.43 5416.54,98.43 5440.55,122.44 P6.3 5440.55,256.69 5505.21,321.35 R33.2
  Bottom Layer w10: v1(2867.72,247.64) 2898.17,247.64 2906.69,256.16 3575.34,256.16 3601.18,230.32 3601.18,68.98 3611.25,58.91 5381.1,58.92 5423.88,58.92 5440.55,75.59 P6.3
UART_RXD1: U3.5 U10.19 | length 4668.2
  Top Layer w10: U3.5 1426.77,698.03 1496.46,628.35 1496.46,304.72 1524.02,277.17 2075.59,277.17 2122.44,324.02 2122.44,469.68 v1(2137.8,485.04) ; v1(3817.32,959.06) 4570.08,959.06 4600.79,989.76 4600.79,1049.61 4607.17,1055.98 U10.19
  Bottom Layer w10: v1(2137.8,485.04) 2255.91,485.04 2285.44,455.5 2315.35,455.5 3803.72,455.31 3842.39,493.97 3842.45,914.17 ; v1(3817.32,959.06) 3842.45,933.93 3842.45,914.17
UART_TX-O: C15.2 P6.4 R29.2 U3.28 | length 4902.9
  Top Layer w10: U3.28 1946.62,898.43 2011.42,833.63 2011.42,727.75 2054.43,684.74 2575.57,684.74 2655.98,604.33 2796.06,604.33 2824.8,575.59 2824.8,224.02 v1(2814.57,213.78) ; P6.4 5540.55,207.09 5619.39,285.92 R29.2 5620.24,381.26 C15.2
  Bottom Layer w10: v1(2814.57,213.78) 2921.26,213.78 2943.7,236.22 3567.08,236.22 3581.25,222.06 3581.25,60.72 3602.99,38.98 5447.64,38.98 5529.14,38.98 5540.55,50.39 P6.4
UART_TXD1: U3.4 U10.18 | length 4736.4
  Top Layer w10: U3.4 1407.09,689.88 1476.77,620.19 1476.77,296.57 1515.86,257.48 2083.74,257.48 2142.13,315.86 2142.13,432.94 v1(2167.32,458.14) ; v1(3837.4,998.03) 4540.55,998.03 4560.63,1018.11 4560.63,1077.95 4588.66,1105.98 U10.18
  Bottom Layer w10: v1(2167.32,458.14) 2250.52,458.14 2273.28,435.38 3811.97,435.38 3862.32,485.72 3862.38,945.28 3862.38,975.99 3840.34,998.03 v1(3837.4,998.03)
V3_3D: D19.1 P6.1 R29.1 R31.2 R33.1 R34.2 U10.1 U10.2 | length 2979.2
  Top Layer w10: D19.1 5051.45,1993.18 5104.33,2046.06 5559.06,2046.06 5590.16,2014.96 5590.16,1817.72 5569.69,1797.24 R31.2 ; P6.1 5240.55,229.13 5329.92,318.5 5329.92,443.31 5356.47,469.86 R34.2 5617.13,469.86 R29.1 5619.39,1435.73 5530.32,1524.8 U10.1 ; U10.2 U10.1 ; R31.2@5504.57,1796.46 5530.32,1770.71 U10.1
VCC3V3: C1.2 C3.1 C4.1 C5.1 C6.1 C16.2 C17.2 C18.2 C19.2 C20.2 C21.2 C22.2 C23.2 C27.2 CA1.1 JP2.23 JP2.25 P1.1 P1.2 P2.4 R1.2 R2.1 R56.2 R57.2 R58.2 R67.2 U1.2 U2.1 U2.13 U2.19 U2.32 U2.48 U2.64 U3.9 U3.13 U3.31 U3.45 U3.59 U3.63 U3.80 U3.94 U6.4 | length 18958
  Top Layer w10: JP2.23 JP2.25 JP2.25@586.22,1723.23 ; P2.4 862.6,168.68 862.6,339.37 900,376.77 1326.77,376.77 1337.57,387.57 R57.2 R58.2 1337.57,602.19 1290.16,649.61 v1(1290.16,673.23) ; U2.13 3131.89,938.58 ; v1(3100.39,731.89) 3154.72,731.89 3170.47,747.64 U2.19 3170.47,911.42 3143.31,938.58 3131.89,938.58 ; R2.1 3118.44,1689.31 3222.83,1793.7 3758.69,1793.7 3836.83,1871.83 P1.2 ; U2.64 3066.93,1253.54 3052.36,1238.98 v1(3052.36,1213.78) U2.1 3131.1,1174.8 ; U2.32 3426.38,742.13 v1(3441.34,727.17) ; v1(3505.12,1239.37) U2.48 3131.1,1174.8 ; 3131.1,1174.8 3131.1,939.37 3131.89,938.58
  Top Layer w11.81: JP2.25@586.22,1723.23 874.02,1723.23 953.94,1803.15 1166.93,1803.15 ; R56.2 1074.63,1652.9 R1.2 1165.53,1801.75 1166.93,1803.15 ; U3.94 1394.09,977.17 v1(1395.28,978.35) ; U3.80 1392.52,1252.76 v1(1394.09,1254.33) ; v1(1370.47,1803.15) 1166.93,1803.15 ; U3.9 1505.51,868.11 v1(1522.83,885.43) ; v1(1578.35,1311.81) 1584.25,1317.72 U3.63 ; U3.13 v1(1584.25,885.83) ; U3.59 1662.99,1323.23 v1(1672.05,1314.17) ; v1(1777.17,1109.45) 1777.17,1183.07 1827.17,1233.07 U3.45 ; v1(1785.04,956.3) 1786.22,957.48 U3.31 ; U6.4 1984.02,350.79 C27.2 v1(2044.25,348.98)
  Top Layer w19.68: v1(3441.34,533.86) v1(3441.34,727.17) 3662.2,727.17 3727.95,792.91 v1@4160.63,792.91 ; v1(4160.63,793.31) 4160.63,682.28 4119.29,640.94 C1.2 3958.48,617.74 CA1.1 4079.35,502.54 4150.79,431.1 U1.2@4283.32,431.1 ; U1.2@4468.32,431.1 4475.41,424.02 R67.2
  Bottom Layer w10: JP2.23 767.72,1623.23 831.89,1559.06 1327.56,1559.06 1392.17,1494.45 1392.17,1256.26 v1(1394.09,1254.33) ; v1(1290.16,673.23) 1290.16,957.03 1311.48,978.35 v1(1395.28,978.35) ; C5.1 3012.2,731.89 v1(3100.39,731.89) 3105.12,727.17 v1(3441.34,727.17) 3554.72,727.17 C4.1 ; C3.1 3009.06,1225.98 3021.26,1213.78 v1(3052.36,1213.78) ; v1(3505.12,1239.37) 3547.64,1239.37 3564.96,1256.69 C6.1
  Bottom Layer w11.81: C19.2 1389.03,984.59 v1(1395.28,978.35) ; C18.2 1369.07,1105.29 1394.09,1130.31 ; C20.2 1505.12,679.93 1505.12,867.72 v1(1522.83,885.43) ; C16.2 1578.35,1462.21 v1@1578.35,1314.17 ; v1(1578.35,1311.81) v1@1578.35,1314.17 ; v1(1584.25,885.83) v1@1584.25,885.43 ; C21.2 1584.25,761.97 v1@1584.25,885.43 ; C17.2 1672.05,1504.96 v1(1672.05,1314.17) v1@1578.35,1314.17 ; C22.2 2008.8,1109.45 v1(1777.17,1109.45) 1785.04,1101.57 v1(1785.04,956.3) ; 2031.89,522.05 2245.46,522.05 2287.58,479.92 3334.25,479.92 3388.19,533.86 v1(3441.34,533.86) ; v1(2044.25,348.98) 2029.13,364.09 2029.13,968.42 C23.2 1981.07,956.3 v1(1785.04,956.3) ; v1(1395.28,978.35) 1395.28,922.83 1432.68,885.43 v1(1522.83,885.43) ; v1(1395.28,978.35) 1395.28,1255.51 1453.94,1314.17 v1@1578.35,1314.17 ; v1(1522.83,885.43) v1@1584.25,885.43 ; v1@1584.25,885.43 1766.54,885.43 1785.04,903.94 v1(1785.04,956.3)
  Bottom Layer w19.68: v1(1370.47,1803.15) 3771.47,1803.15 P1.1 3836.83,1754.91 3889.37,1702.36 4000.79,1702.36 4075.59,1627.56 4075.59,1295.67 4160.63,1210.63 v1(4160.63,793.31)
VDD_5V: C2.2 CA2.1 JP2.21 JP2.22 P4.5 P4.6 U1.3 | length 9472
  Top Layer w39.37: JP2.21 JP2.22 451.18,1523.23 404.72,1569.69 404.72,2055.91 440.16,2091.34 1045.28,2091.34 1076.77,2059.84 1076.77,1925.2 v1(1102.36,1899.61) ; P4.5 P4.6 3262.2,242.91 3295.28,275.98 3626.38,275.98 3669.68,232.68 3669.68,125.98 3715.75,79.92 3900,79.92 3955.72,135.65 CA2.1 3957.17,340.6 U1.3
  Bottom Layer w39.37: v1(1102.36,1899.61) 1119.29,1882.68 3631.89,1882.68 3681.1,1931.89 3681.1,1995.67 3753.94,2068.5 4841.34,2068.5 4898.03,2011.81 4898.03,394.88 4841.73,338.58 v1(4094.09,338.58)
pads on no net: P1.17 P1.19 P2.6 P2.7 P2.8 P3.3 P3.4 P3.5 P3.6 P3.22 P3.23 P3.24 P3.25 P3.27 P3.28 P3.29 P3.30 P3.31 P3.32 P3.33 P3.34 P3.35 P3.36 P3.37 P3.38 P3.39 P3.40 P3.41 P3.42 P3.43 P3.44 P3.45 P3.46 P4.3 P4.4 P4.7 P4.8 P4.9 P4.10 P4.11 P4.13 P4.28 P4.29 P4.30 P4.31 P4.32 P4.33 P4.34 P4.35 P4.36 P4.37 P4.38 P4.39 P4.40 P4.42 P5.3 P5.4 U2.2 U2.3 U2.4 U2.26 U2.27 U2.33 U2.34 U2.35 U2.36 U2.53 U2.54 U2.57 U2.62 U3.18 U6.1 U10.3 U10.4 U10.5 U10.6 U10.8 U10.9 U10.10 U10.12 U10.13 U10.14 U10.17 U10.20 U10.21 U10.22 U10.23 U10.24 U10.25 U10.26 U10.27 U10.28 U10.29

## Polygon pours and split planes (outlines as drawn)
GND on Top Layer "Top Layer-No Net 1" (solid, pour order 17): 0,2125.98 1.97,2124.02 6220.47,2124.02 6220.47,0 0,0 0,2116.54
GND on Bottom Layer "Top Layer-No Net 1" (solid, pour order 15): 0,2125.98 6220.47,2125.98 6220.47,0 0,0 0,2125.98

## Keep-outs
Keep-Out Layer:
  circle w10: c6023.62,1929.13 r66.93
  circle w10: c196.85,1929.13 r66.93
  circle w10: c196.85,196.85 r66.93
  circle w10: c6023.62,196.85 r66.93
  lines w10: 0,0 0,2125.98 6220.47,2125.98 6220.47,0 0,0

## Silkscreen, mask and mechanical layers (free items; w line width, h text height)
Top Overlay:
  circle w10: c196.85,1929.13 r157.48
  circle w10: c196.85,196.85 r157.48
  circle w10: c6023.62,1929.13 r157.48
  circle w10: c6023.62,196.85 r157.48
  text "JS-CPU-M3-1.0" at 3953.94,1212.6 h60
  text "2014-12-16" at 4048.03,1078.35 h60

## Dimensions
0,2125.98 to 6220.47,2125.98 on Keep-Out Layer
0,2125.98 to 0,0 on Keep-Out Layer

## Text inside footprints (layer, text, board x,y; h text height)
JP2: Top Overlay "1" at 627.56,407.87 h39.37 r90; Top Overlay "2" at 448.03,395.28 h39.37 r90; Top Overlay "15" at 639.76,1148.03 h39.37 r90; Top Overlay "16" at 463.39,1147.24 h39.37 r90; Top Overlay "31" at 708.66,2055.91 h39.37 r90; Top Overlay "32" at 385.43,2043.31 h39.37 r90
P3: Bottom Overlay "45" at 1120.08,1988.19 h39.37 r180; Bottom Overlay "46" at 1120.87,2088.19 h39.37 r180; Bottom Overlay "1" at 3540.94,1969.29 h39.37 r180; Bottom Overlay "2" at 3531.1,2096.46 h39.37 r180
P4: Bottom Overlay "2" at 3534.25,187.32 h39.37 r180; Bottom Overlay "1" at 3545.67,77.48 h39.37 r180; Bottom Overlay "46" at 1122.44,181.81 h39.37 r180; Bottom Overlay "45" at 1119.29,79.84 h39.37 r180